# Altium PCB Project_PCBTA.PcbDoc
Units mm, origin at the board's own origin, x right, y up, seen from the top; angles counter-clockwise.
Board outline 152.4 x 101.6 mm, 2 copper layers (Top Layer, Bottom Layer); 36 components, 16 nets, 288 pads, 8 vias.
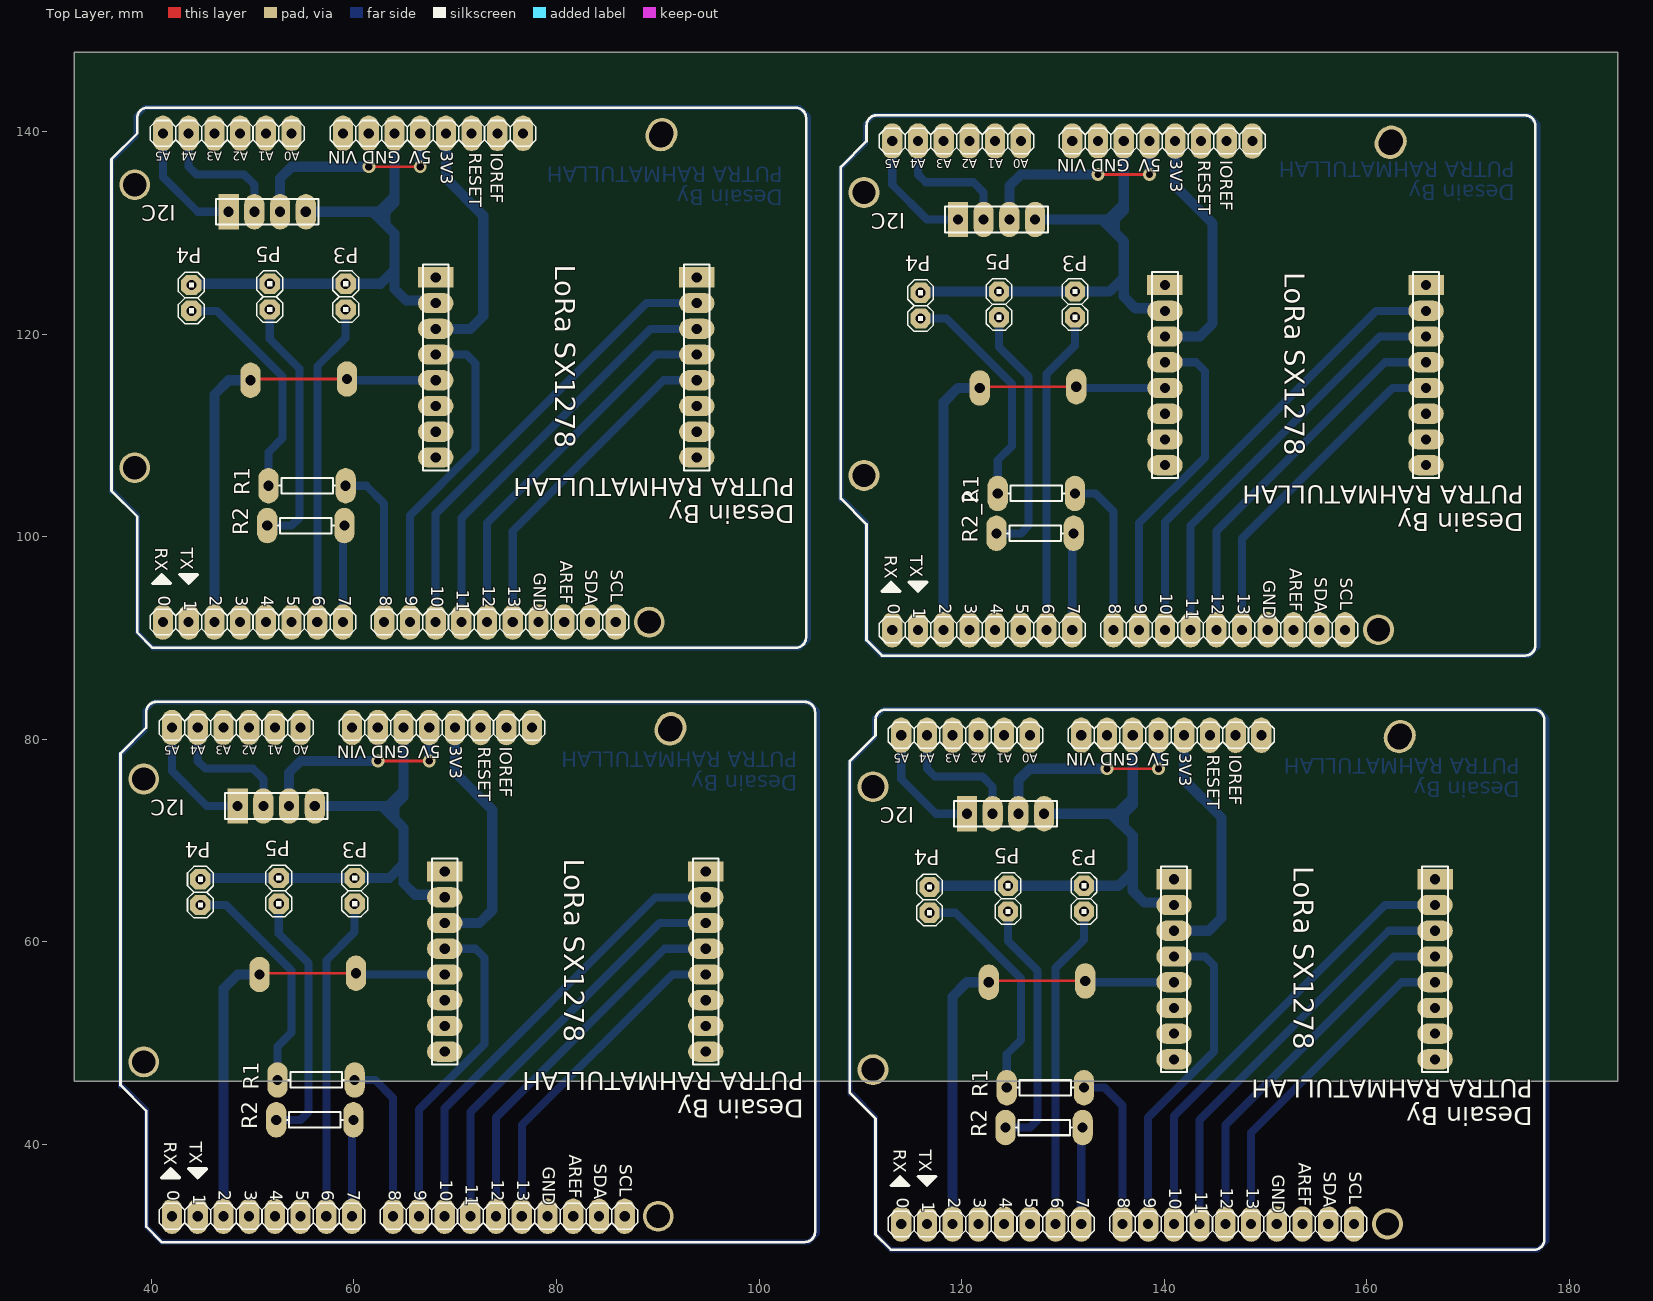
[diagram p0: Top Layer view]
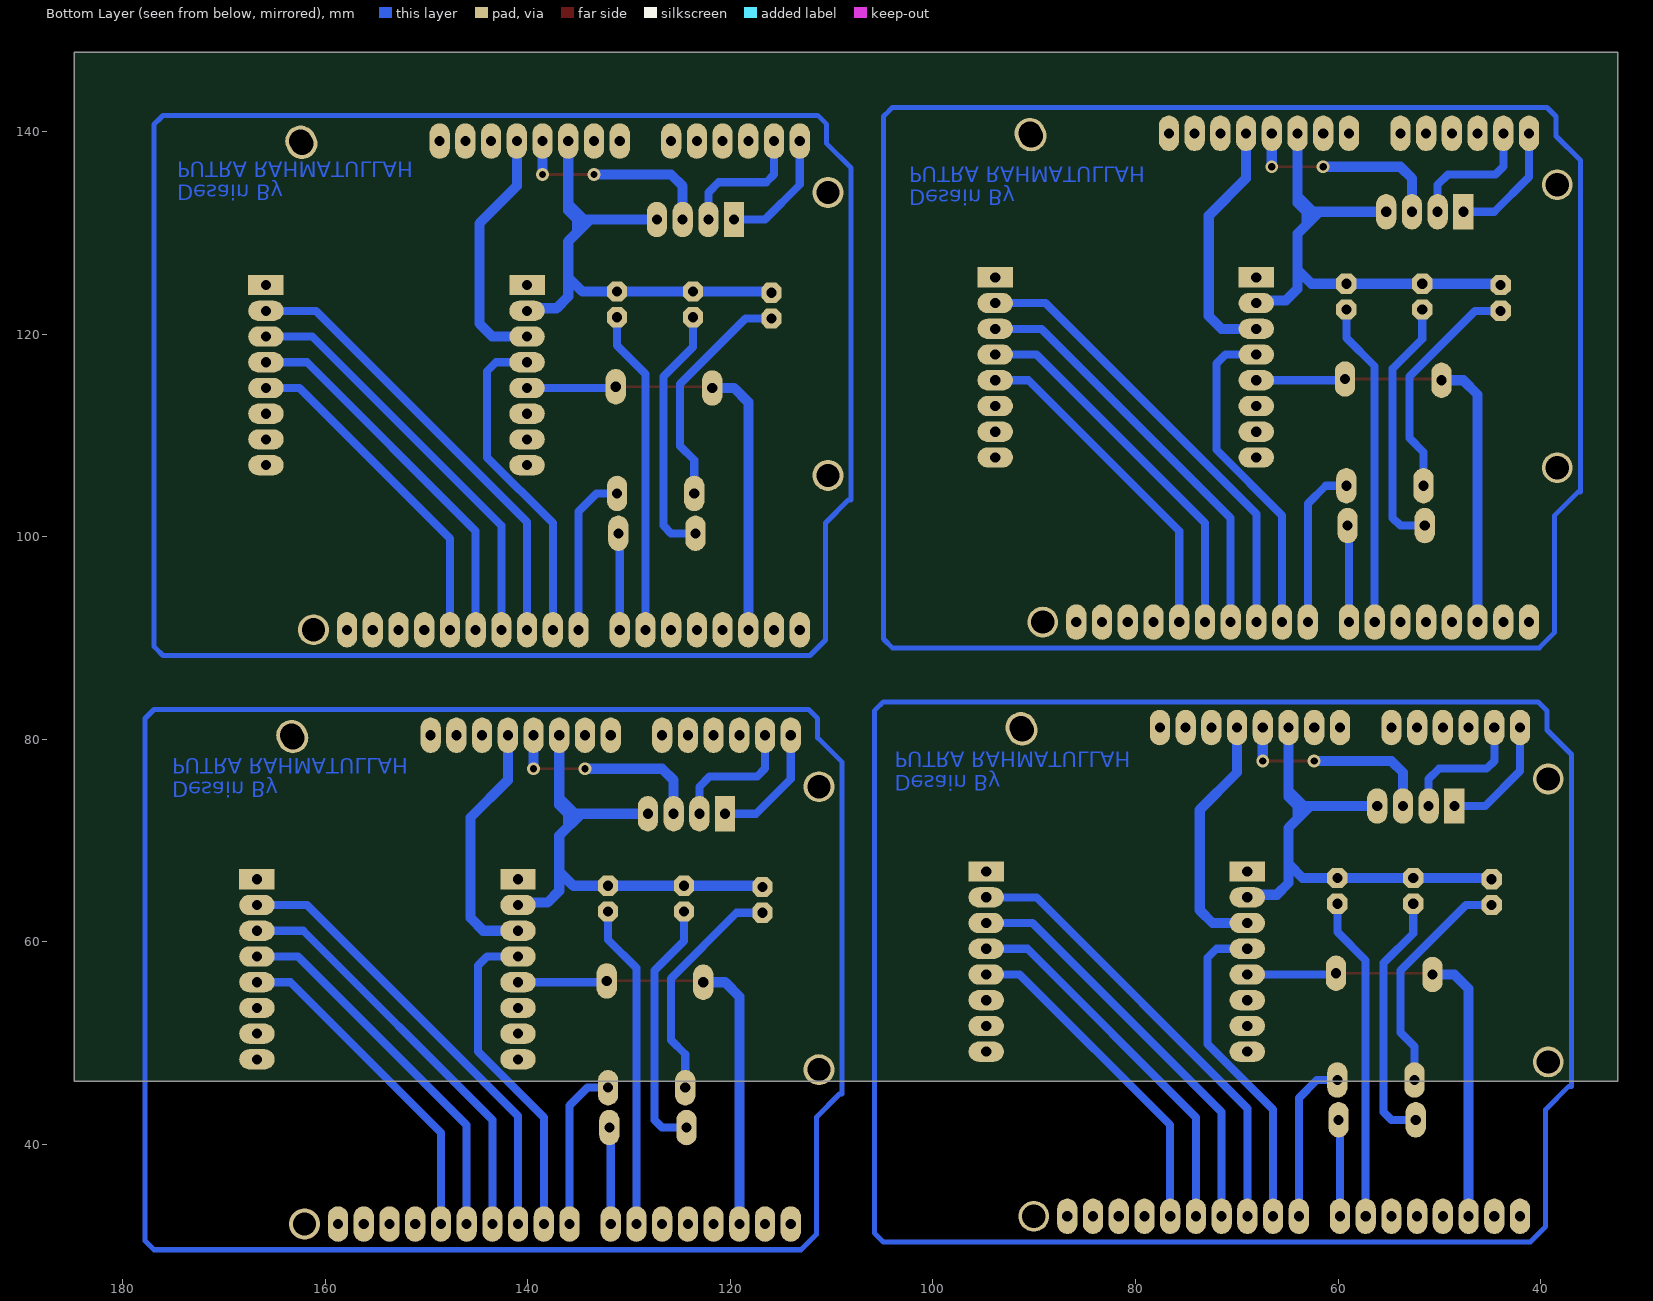
[diagram p1: Bottom Layer view, seen from below]

## Layer stack, top to bottom
Top Solder: solder mask 0.0102, Solder Resist, Dk 3.5
Top Layer: signal copper 0.0356
Dielectric 1: dielectric 0.32, FR-4, Dk 4.8
Bottom Layer: signal copper 0.0356
Bottom Solder: solder mask 0.0102, Solder Resist, Dk 3.5

## Board outline
184.785,147.828 32.385,147.828 32.385,46.228 184.785,46.228

## Design rules (kind name [scope] priority, off if disabled: settings)
Clearance [All] p1: gap=0.254
PolygonConnect [All] p1: connectstyle=Relief reliefconductorwidth=0.254 reliefentries=4 polygonreliefangle="90 Angle" airgapwidth=0.254
RoutingVias [All] p1: holewidth=0.711 width=1.27 viastyle="Through Hole" minholewidth=0.711 minwidth=1.27 maxholewidth=0.711 maxwidth=1.27
SolderMaskExpansion [All] p1: expansion=0.102
Width [All] p1: maxlimit=1 minlimit=0.254 preferedwidth=0.8 toplayer_maxwidth=0.254 toplayer_prefwidth=0.254 bottomlayer_minwidth=0.5 minimp=50.000000 maximp=50.000000 favimp=50.000000
30 further rules are at their usual default settings.

## Components (designator, comment, footprint, x,y, rotation, side; value= is the part's Value field where it differs from the comment)
"Arduino Uno" "ARDUINO UNO" "ARDUINO UNO" 141.478,56.388 r180 top
"Arduino Uno" "ARDUINO UNO" "ARDUINO UNO" 69.469,57.15 r180 top
"Arduino Uno" "ARDUINO UNO" "ARDUINO UNO" 68.58,115.824 r180 top
"Arduino Uno" "ARDUINO UNO" "ARDUINO UNO" 140.589,115.062 r180 top
I2C "Header 4" HDR1X4 120.523,72.644 r0 top (schematic designator P6)
I2C "Header 4" HDR1X4 48.514,73.406 r0 top (schematic designator P6)
I2C "Header 4" HDR1X4 47.625,132.08 r0 top (schematic designator P6)
I2C "Header 4" HDR1X4 119.634,131.318 r0 top (schematic designator P6)
"LoRa SX1278" "Header 8" HDR1X8 166.751,66.167 r270 top (schematic designator P2)
"LoRa SX1278" "Header 8" HDR1X8 94.742,66.929 r270 top (schematic designator P2)
"LoRa SX1278" "Header 8" HDR1X8 93.853,125.603 r270 top (schematic designator P2)
"LoRa SX1278" "Header 8" HDR1X8 165.862,124.841 r270 top (schematic designator P2)
P1 "Header 8" HDR1X8 140.97,66.167 r270 top
P1 "Header 8" HDR1X8 68.961,66.929 r270 top
P1 "Header 8" HDR1X8 68.072,125.603 r270 top
P1 "Header 8" HDR1X8 140.081,124.841 r270 top
P3 "Header 2" My_1X02 132.08,62.992 r270 top
P3 "Header 2" My_1X02 60.071,63.754 r270 top
P3 "Header 2" My_1X02 59.182,122.428 r270 top
P3 "Header 2" My_1X02 131.191,121.666 r270 top
P4 "Header 2" My_1X02 116.84,62.865 r270 top
P4 "Header 2" My_1X02 44.831,63.627 r270 top
P4 "Header 2" My_1X02 43.942,122.301 r270 top
P4 "Header 2" My_1X02 115.951,121.539 r270 top
P5 "Header 2" My_1X02 124.587,62.992 r270 top
P5 "Header 2" My_1X02 52.578,63.754 r270 top
P5 "Header 2" My_1X02 51.689,122.428 r270 top
P5 "Header 2" My_1X02 123.698,121.666 r270 top
R1 "Res 0.25W" "Res 0.25" 128.27,45.593 r180 top
R1 "Res 0.25W" "Res 0.25" 56.261,46.355 r180 top
R1 "Res 0.25W" "Res 0.25" 55.372,105.029 r180 top
R1 "Res 0.25W" "Res 0.25" 127.381,104.267 r180 top
R2 "Res 0.25W" "Res 0.25" 128.143,41.656 r180 top
R2 "Res 0.25W" "Res 0.25" 56.134,42.418 r180 top
R2 "Res 0.25W" "Res 0.25" 55.245,101.092 r180 top
R2_2 "Res 0.25W" "Res 0.25" 127.254,100.33 r180 top (schematic designator R2)

## Footprints (in the part's own frame and the unit in brackets; to place one, negate y for a bottom-side part, rotate by r counter-clockwise, add the part's x,y. Pads: shape width x height; smd on the part's side, far side on the other; paste and mask are expansions set on the pad)
"ARDUINO UNO" [mm]
  oval 2x3.5 hole 1: 0(27.44,24.26) 1(24.9,24.26) 2(22.36,24.26) 3(19.82,24.26) 3.3V(-0.5,-24) 4(17.28,24.26) 5(14.74,24.26) 5V(2.04,-24) 6(12.2,24.26) 7(9.66,24.26) 8(5.596,24.26) 9(3.056,24.26) 10(0.516,24.26) 11(-2.024,24.26) 12(-4.564,24.26) 13(-7.104,24.26) A0(14.74,-24) A1(17.28,-24) A2(19.82,-24) A3(22.36,-24) A4(24.9,-24) A5(27.44,-24) AREF(-12.184,24.26) GND1(7.12,-24) GND2(4.58,-24) GND3(-9.644,24.26) IOREF(-5.58,-24) NC(-8.12,-24) RST(-3.04,-24) SCL(-17.264,24.26) SDA(-14.724,24.26) Vin(9.66,-24)
  silkscreen extent -36.06,-26.54 32.52,26.8
HDR1X4 [mm] "Connector; Header; 4 Position"
  rect 2x3.5 hole 1: 1(0,0)
  oval 2x3.5 hole 1: 2(2.54,0) 3(5.08,0) 4(7.62,0)
  silkscreen extent -1.27,-1.27 8.89,1.27
HDR1X8 [mm] "Connector; Header; 8 Position"
  rect 2x3.5 hole 1: 1(0,0)
  oval 2x3.5 hole 1: 2(2.54,0) 3(5.08,0) 4(7.62,0) 5(10.16,0) 6(12.7,0) 7(15.24,0) 8(17.78,0)
  silkscreen extent -1.27,-1.27 19.05,1.27
My_1X02 [mm]
  oct 2x2 hole 1: 1(-2.54,0) 2(0,0)
  silkscreen extent -3.81,-1.27 1.27,1.27
"Res 0.25" [mm] "Axial Device, Thru-Hole; 2 Leads; 0.3 in Pin Spacing"
  oval 2x3.5 hole 1: 1(-3.81,0) 2(3.81,0)
  silkscreen extent -2.77,-0.76 2.77,0.76, body extent -4.11,-1.2 4.11,1.2, height 2.7

## Part data
I2C I2C I2C I2C: "Header, 4-Pin"
"LoRa SX1278" "LoRa SX1278" "LoRa SX1278" "LoRa SX1278" P1 P1 P1 P1: "Header, 8-Pin"
P3 P3 P3 P3 P4 P4 P4 P4 P5 P5 P5 P5: "Header, 2-Pin"

## Free pads (board coordinates)
  round 3.048 hole 2.286 paste+0: 0(38.354,106.807) 0(39.243,48.133) 0(110.363,106.045) 0(111.252,47.371) 1(38.354,134.747) 1(39.243,76.073) 1(110.363,133.985) 1(111.252,75.311) 2(89.154,91.567) 2(90.043,32.893) 2(161.163,90.805) 2(162.052,32.131) 3(90.297,139.573) 3(91.186,80.899) 3(162.306,138.811) 3(163.195,80.137) 4(38.354,106.807) 4(39.243,48.133) 4(110.363,106.045) 4(111.252,47.371) 5(38.354,134.747) 5(39.243,76.073) 5(110.363,133.985) 5(111.252,75.311) 6(90.424,139.827) 6(91.313,81.153) 6(162.433,139.065) 6(163.322,80.391) 7(89.154,91.567) 7(90.043,32.893) 7(161.163,90.805) 7(162.052,32.131)
  oval 2x3.5 hole 1: 15(49.784,115.443) 15(50.673,56.769) 15(59.309,115.57) 15(60.198,56.896) 15(121.793,114.681) 15(122.682,56.007) 15(131.318,114.808) 15(132.207,56.134)

## Via types
v1: diameter 1.27, hole 0.711, Top Layer to Bottom Layer, 8 vias

## Nets (pads, with @x,y where several pads share a name; then routed paths per layer and width w, separated by ;. In a path a pad name is that pad's centre, name@x,y a point inside that pad or via, vN(x,y) a via of type N, cw(c..) or ccw(c..) an arc to the next point about the centre after c; other vN are vias at no path point)
5V: 
GND: 
"NetArduino Uno_2": 
"NetArduino Uno_6": 
"NetArduino Uno_7": 
"NetArduino Uno_8": 
"NetArduino Uno_9": 
"NetArduino Uno_10": 
"NetArduino Uno_11": 
"NetArduino Uno_12": 
"NetArduino Uno_13": 
"NetArduino Uno_A4": 
"NetArduino Uno_A5": 
NetP4_2: 
NetP5_2: 
VCC: 
pads on no net: "Arduino Uno.0" "Arduino Uno.1" "Arduino Uno.2" "Arduino Uno.3" "Arduino Uno.3.3V" "Arduino Uno.4" "Arduino Uno.5" "Arduino Uno.5V" "Arduino Uno.6" "Arduino Uno.7" "Arduino Uno.8" "Arduino Uno.9" "Arduino Uno.10" "Arduino Uno.11" "Arduino Uno.12" "Arduino Uno.13" "Arduino Uno.A0" "Arduino Uno.A1" "Arduino Uno.A2" "Arduino Uno.A3" "Arduino Uno.A4" "Arduino Uno.A5" "Arduino Uno.AREF" "Arduino Uno.GND1" "Arduino Uno.GND2" "Arduino Uno.GND3" "Arduino Uno.IOREF" "Arduino Uno.NC" "Arduino Uno.RST" "Arduino Uno.SCL" "Arduino Uno.SDA" "Arduino Uno.Vin" "LoRa SX1278.1" "LoRa SX1278.2" "LoRa SX1278.3" "LoRa SX1278.4" "LoRa SX1278.5" "LoRa SX1278.6" "LoRa SX1278.7" "LoRa SX1278.8" I2C.1 I2C.2 I2C.3 I2C.4 P1.1 P1.2 P1.3 P1.4 P1.5 P1.6 P1.7 P1.8 P3.1 P3.2 P4.1 P4.2 P5.1 P5.2 R1.1 R1.2 R2.1 R2.2 R2_2.1 R2_2.2
copper on no net: | length 2840.2
  Top Layer w0.254: 49.784,115.443 49.911,115.57 59.309,115.57 ; 50.673,56.769 50.8,56.896 60.198,56.896 ; v1(61.468,136.525) v1(66.548,136.525) ; v1(62.357,77.851) v1(67.437,77.851) ; 121.793,114.681 121.92,114.808 131.318,114.808 ; 122.682,56.007 122.809,56.134 132.207,56.134 ; v1(133.477,135.763) v1(138.557,135.763) ; v1(134.366,77.089) v1(139.446,77.089)
  Bottom Layer w0.5: 97.536,89.027 103.251,89.027 104.013,89.027 104.775,89.789 104.902,89.916 104.902,141.097 104.902,141.478 104.267,142.113 104.013,142.367 39.37,142.367 38.481,141.478 38.481,139.7 38.481,139.573 36.068,137.16 36.068,104.394 36.322,104.394 38.608,102.108 38.608,90.551 40.132,89.027 103.632,89.027 ; 98.425,30.353 104.14,30.353 104.902,30.353 105.664,31.115 105.791,31.242 105.791,82.423 105.791,82.804 105.156,83.439 104.902,83.693 40.259,83.693 39.37,82.804 39.37,81.026 39.37,80.899 36.957,78.486 36.957,45.72 37.211,45.72 39.497,43.434 39.497,31.877 41.021,30.353 104.521,30.353 ; 169.545,88.265 175.26,88.265 176.022,88.265 176.784,89.027 176.911,89.154 176.911,140.335 176.911,140.716 176.276,141.351 176.022,141.605 111.379,141.605 110.49,140.716 110.49,138.938 110.49,138.811 108.077,136.398 108.077,103.632 108.331,103.632 110.617,101.346 110.617,89.789 112.141,88.265 175.641,88.265 ; 170.434,29.591 176.149,29.591 176.911,29.591 177.673,30.353 177.8,30.48 177.8,81.661 177.8,82.042 177.165,82.677 176.911,82.931 112.268,82.931 111.379,82.042 111.379,80.264 111.379,80.137 108.966,77.724 108.966,44.958 109.22,44.958 111.506,42.672 111.506,31.115 113.03,29.591 176.53,29.591
  Bottom Layer w0.8: 41.14,139.824 41.14,135.517 44.577,132.08 47.625,132.08 ; 42.029,81.15 42.029,76.843 45.466,73.406 48.514,73.406 ; 43.68,139.824 43.68,136.533 44.45,135.763 49.149,135.763 50.165,134.747 50.165,132.08 ; 43.942,122.301 46.482,122.301 52.959,115.824 52.959,111.379 52.959,109.728 51.562,108.331 51.562,105.029 ; 44.569,81.15 44.569,77.859 45.339,77.089 50.038,77.089 51.054,76.073 51.054,73.406 ; 44.831,63.627 47.371,63.627 53.848,57.15 53.848,52.705 53.848,51.054 52.451,49.657 52.451,46.355 ; 51.435,101.092 53.848,101.092 54.61,101.854 54.61,110.363 54.61,116.586 51.689,119.507 51.689,122.428 ; 52.324,42.418 54.737,42.418 55.499,43.18 55.499,51.689 55.499,57.912 52.578,60.833 52.578,63.754 ; 56.38,91.564 56.38,116.832 59.182,119.634 59.182,122.428 ; 57.269,32.89 57.269,58.158 60.071,60.96 60.071,63.754 ; 58.92,91.564 58.92,100.957 59.055,101.092 ; 59.182,105.029 61.214,105.029 62.984,103.259 62.984,91.564 ; 59.436,115.443 68.072,115.443 ; 59.809,32.89 59.809,42.283 59.944,42.418 ; 60.071,46.355 62.103,46.355 63.873,44.585 63.873,32.89 ; 60.325,56.769 68.961,56.769 ; 65.524,91.564 65.524,102.1 72.009,108.585 72.009,117.094 71.12,117.983 68.072,117.983 ; 66.413,32.89 66.413,43.426 72.898,49.911 72.898,58.42 72.009,59.309 68.961,59.309 ; 68.064,91.564 68.064,102.227 88.9,123.063 93.853,123.063 ; 68.953,32.89 68.953,43.553 89.789,64.389 94.742,64.389 ; 70.604,91.564 70.604,101.846 89.281,120.523 93.853,120.523 ; 71.493,32.89 71.493,43.172 90.17,61.849 94.742,61.849 ; 73.144,91.564 73.144,101.338 89.789,117.983 93.853,117.983 ; 74.033,32.89 74.033,42.664 90.678,59.309 94.742,59.309 ; 75.684,91.564 75.684,100.576 90.551,115.443 93.853,115.443 ; 76.573,32.89 76.573,41.902 91.44,56.769 94.742,56.769 ; 113.149,139.062 113.149,134.755 116.586,131.318 119.634,131.318 ; 114.038,80.388 114.038,76.081 117.475,72.644 120.523,72.644 ; 115.689,139.062 115.689,135.771 116.459,135.001 121.158,135.001 122.174,133.985 122.174,131.318 ; 115.951,121.539 118.491,121.539 124.968,115.062 124.968,110.617 124.968,108.966 123.571,107.569 123.571,104.267 ; 116.578,80.388 116.578,77.097 117.348,76.327 122.047,76.327 123.063,75.311 123.063,72.644 ; 116.84,62.865 119.38,62.865 125.857,56.388 125.857,51.943 125.857,50.292 124.46,48.895 124.46,45.593 ; 123.444,100.33 125.857,100.33 126.619,101.092 126.619,109.601 126.619,115.824 123.698,118.745 123.698,121.666 ; 124.333,41.656 126.746,41.656 127.508,42.418 127.508,50.927 127.508,57.15 124.587,60.071 124.587,62.992 ; 128.389,90.802 128.389,116.07 131.191,118.872 131.191,121.666 ; 129.278,32.128 129.278,57.396 132.08,60.198 132.08,62.992 ; 130.929,90.802 130.929,100.195 131.064,100.33 ; 131.191,104.267 133.223,104.267 134.993,102.497 134.993,90.802 ; 131.445,114.681 140.081,114.681 ; 131.818,32.128 131.818,41.521 131.953,41.656 ; 132.08,45.593 134.112,45.593 135.882,43.823 135.882,32.128 ; 132.334,56.007 140.97,56.007 ; 137.533,90.802 137.533,101.338 144.018,107.823 144.018,116.332 143.129,117.221 140.081,117.221 ; 138.422,32.128 138.422,42.664 144.907,49.149 144.907,57.658 144.018,58.547 140.97,58.547 ; 140.073,90.802 140.073,101.465 160.909,122.301 165.862,122.301 ; 140.962,32.128 140.962,42.791 161.798,63.627 166.751,63.627 ; 142.613,90.802 142.613,101.084 161.29,119.761 165.862,119.761 ; 143.502,32.128 143.502,42.41 162.179,61.087 166.751,61.087 ; 145.153,90.802 145.153,100.576 161.798,117.221 165.862,117.221 ; 146.042,32.128 146.042,41.902 162.687,58.547 166.751,58.547 ; 147.693,90.802 147.693,99.814 162.56,114.681 165.862,114.681 ; 148.582,32.128 148.582,41.14 163.449,56.007 166.751,56.007
  Bottom Layer w1: 43.942,124.841 44.069,124.968 51.689,124.968 59.182,124.968 62.611,124.968 63.881,126.238 64,126.238 ; 44.831,66.167 44.958,66.294 52.578,66.294 60.071,66.294 63.5,66.294 64.77,67.564 64.889,67.564 ; 46.22,91.564 46.22,114.038 47.625,115.443 49.784,115.443 ; 47.109,32.89 47.109,55.364 48.514,56.769 50.673,56.769 ; 52.705,132.08 52.705,135.382 53.848,136.525 v1(61.468,136.525) ; 53.594,73.406 53.594,76.708 54.737,77.851 v1(62.357,77.851) ; 55.245,132.08 61.841,132.08 ; 56.134,73.406 62.73,73.406 ; 62.738,131.191 63.119,130.81 63.119,132.08 64,132.961 64,133.604 ; 63.627,72.517 64.008,72.136 64.008,73.406 64.889,74.287 64.889,74.93 ; 64,139.824 64,133.604 ; 64.889,81.15 64.889,74.93 ; 66.54,139.824 66.54,136.533 v1(66.548,136.525) ; 67.429,81.15 67.429,77.859 v1(67.437,77.851) ; 68.072,120.523 71.501,120.523 72.771,121.793 72.771,131.699 69.08,135.39 69.08,139.824 ; 68.072,123.063 67.818,123.317 65.151,123.317 64,124.468 64,126.238 ; 68.961,61.849 72.39,61.849 73.66,63.119 73.66,73.025 69.969,76.716 69.969,81.15 ; 68.961,64.389 68.707,64.643 66.04,64.643 64.889,65.794 64.889,67.564 ; 115.951,124.079 116.078,124.206 123.698,124.206 131.191,124.206 134.62,124.206 135.89,125.476 136.009,125.476 ; 116.84,65.405 116.967,65.532 124.587,65.532 132.08,65.532 135.509,65.532 136.779,66.802 136.898,66.802 ; 118.229,90.802 118.229,113.276 119.634,114.681 121.793,114.681 ; 119.118,32.128 119.118,54.602 120.523,56.007 122.682,56.007 ; 124.714,131.318 124.714,134.62 125.857,135.763 v1(133.477,135.763) ; 125.603,72.644 125.603,75.946 126.746,77.089 v1(134.366,77.089) ; 127.254,131.318 133.85,131.318 ; 128.143,72.644 134.739,72.644 ; 134.747,130.429 135.128,130.048 135.128,131.318 136.009,132.199 136.009,132.842 ; 135.636,71.755 136.017,71.374 136.017,72.644 136.898,73.525 136.898,74.168 ; 136.009,139.062 136.009,132.842 ; 136.898,80.388 136.898,74.168 ; 138.549,139.062 138.549,135.771 v1(138.557,135.763) ; 139.438,80.388 139.438,77.097 v1(139.446,77.089) ; 140.081,119.761 143.51,119.761 144.78,121.031 144.78,130.937 141.089,134.628 141.089,139.062 ; 140.081,122.301 139.827,122.555 137.16,122.555 136.009,123.706 136.009,125.476 ; 140.97,61.087 144.399,61.087 145.669,62.357 145.669,72.263 141.978,75.954 141.978,80.388 ; 140.97,63.627 140.716,63.881 138.049,63.881 136.898,65.032 136.898,66.802 ; 61.841,132.08 62.476,132.08 64,133.604 ; 61.841,132.08 64,129.921 64,126.238 ; 62.73,73.406 64.889,71.247 64.889,67.564 ; 62.73,73.406 63.365,73.406 64.889,74.93 ; 133.85,131.318 136.009,129.159 136.009,125.476 ; 133.85,131.318 134.485,131.318 136.009,132.842 ; 134.739,72.644 135.374,72.644 136.898,74.168 ; 134.739,72.644 136.898,70.485 136.898,66.802

## Other copper
Bottom Layer:
  text "Desain By  / PUTRA RAHMATULLAH" at 174.625,137.033 h1.52 r180
  text "Desain By  / PUTRA RAHMATULLAH" at 102.362,136.525 h1.52 r180
  text "Desain By  / PUTRA RAHMATULLAH" at 103.759,78.74 h1.52 r180
  text "Desain By  / PUTRA RAHMATULLAH" at 175.133,78.105 h1.52 r180

## Silkscreen, mask and mechanical layers (free items; w line width, h text height)
Top Overlay:
  text "Desain By / PUTRA RAHMATULLAH" at 103.505,105.791 h1.8 r180
  text "Desain By / PUTRA RAHMATULLAH" at 175.514,105.029 h1.8 r180
  text "Desain By / PUTRA RAHMATULLAH" at 104.394,47.117 h1.8 r180
  text "Desain By / PUTRA RAHMATULLAH" at 176.403,46.355 h1.8 r180

## Text inside footprints (layer, text, board x,y; h text height)
"Arduino Uno": Top Overlay "5V" at 140.581,78.61 h1.21 r180; Top Overlay "A0" at 127.525,78.585 h0.86 r180; Top Overlay "AREF" at 153.292,38.185 h1.21 r270; Top Overlay "GND" at 150.65,37.002 h1.21 r270; Top Overlay "RESET" at 144.264,78.483 h1.21 r270; Top Overlay "3V3" at 141.47,78.61 h1.21 r270; Top Overlay "A1" at 124.985,78.585 h0.86 r180; Top Overlay "A2" at 122.445,78.585 h0.86 r180; Top Overlay "A3" at 119.905,78.585 h0.86 r180; Top Overlay "A4" at 117.365,78.585 h0.86 r180; Top Overlay "A5" at 114.825,78.585 h0.86 r180; Top Overlay "VIN" at 133.215,78.61 h1.21 r180; Top Overlay "GND" at 137.508,78.61 h1.21 r180; Top Overlay "IOREF" at 146.423,78.483 h1.21 r270; Top Overlay "TX" at 115.816,39.469 h1.21 r270; Top Overlay "RX" at 113.276,39.494 h1.21 r270; Top Overlay "13" at 148.135,35.719 h1.21 r270; Top Overlay "12" at 145.595,35.719 h1.21 r270; Top Overlay "11" at 143.055,35.316 h1.21 r270; Top Overlay "10" at 140.515,35.719 h1.21 r270; Top Overlay "9" at 137.975,34.712 h1.21 r270; Top Overlay "8" at 135.435,34.712 h1.21 r270; Top Overlay "7" at 131.371,34.712 h1.21 r270; Top Overlay "6" at 128.831,34.712 h1.21 r270; Top Overlay "5" at 126.291,34.712 h1.21 r270; Top Overlay "4" at 123.751,34.712 h1.21 r270; Top Overlay "3" at 121.211,34.712 h1.21 r270; Top Overlay "2" at 118.671,34.712 h1.21 r270; Top Overlay "1" at 116.131,34.309 h1.21 r270; Top Overlay "0" at 113.591,34.712 h1.21 r270; Top Overlay "SCL" at 158.278,37.288 h1.21 r270; Top Overlay "SDA" at 155.749,37.301 h1.21 r270
"Arduino Uno": Top Overlay "5V" at 68.572,79.372 h1.21 r180; Top Overlay "A0" at 55.516,79.347 h0.86 r180; Top Overlay "AREF" at 81.283,38.947 h1.21 r270; Top Overlay "GND" at 78.641,37.764 h1.21 r270; Top Overlay "RESET" at 72.255,79.245 h1.21 r270; Top Overlay "3V3" at 69.461,79.372 h1.21 r270; Top Overlay "A1" at 52.976,79.347 h0.86 r180; Top Overlay "A2" at 50.436,79.347 h0.86 r180; Top Overlay "A3" at 47.896,79.347 h0.86 r180; Top Overlay "A4" at 45.356,79.347 h0.86 r180; Top Overlay "A5" at 42.816,79.347 h0.86 r180; Top Overlay "VIN" at 61.206,79.372 h1.21 r180; Top Overlay "GND" at 65.499,79.372 h1.21 r180; Top Overlay "IOREF" at 74.414,79.245 h1.21 r270; Top Overlay "TX" at 43.807,40.231 h1.21 r270; Top Overlay "RX" at 41.267,40.256 h1.21 r270; Top Overlay "13" at 76.126,36.481 h1.21 r270; Top Overlay "12" at 73.586,36.481 h1.21 r270; Top Overlay "11" at 71.046,36.078 h1.21 r270; Top Overlay "10" at 68.506,36.481 h1.21 r270; Top Overlay "9" at 65.966,35.474 h1.21 r270; Top Overlay "8" at 63.426,35.474 h1.21 r270; Top Overlay "7" at 59.362,35.474 h1.21 r270; Top Overlay "6" at 56.822,35.474 h1.21 r270; Top Overlay "5" at 54.282,35.474 h1.21 r270; Top Overlay "4" at 51.742,35.474 h1.21 r270; Top Overlay "3" at 49.202,35.474 h1.21 r270; Top Overlay "2" at 46.662,35.474 h1.21 r270; Top Overlay "1" at 44.122,35.071 h1.21 r270; Top Overlay "0" at 41.582,35.474 h1.21 r270; Top Overlay "SCL" at 86.269,38.05 h1.21 r270; Top Overlay "SDA" at 83.74,38.063 h1.21 r270
"Arduino Uno": Top Overlay "5V" at 67.683,138.046 h1.21 r180; Top Overlay "A0" at 54.627,138.021 h0.86 r180; Top Overlay "AREF" at 80.394,97.621 h1.21 r270; Top Overlay "GND" at 77.752,96.438 h1.21 r270; Top Overlay "RESET" at 71.366,137.919 h1.21 r270; Top Overlay "3V3" at 68.572,138.046 h1.21 r270; Top Overlay "A1" at 52.087,138.021 h0.86 r180; Top Overlay "A2" at 49.547,138.021 h0.86 r180; Top Overlay "A3" at 47.007,138.021 h0.86 r180; Top Overlay "A4" at 44.467,138.021 h0.86 r180; Top Overlay "A5" at 41.927,138.021 h0.86 r180; Top Overlay "VIN" at 60.317,138.046 h1.21 r180; Top Overlay "GND" at 64.61,138.046 h1.21 r180; Top Overlay "IOREF" at 73.525,137.919 h1.21 r270; Top Overlay "TX" at 42.918,98.905 h1.21 r270; Top Overlay "RX" at 40.378,98.93 h1.21 r270; Top Overlay "13" at 75.237,95.155 h1.21 r270; Top Overlay "12" at 72.697,95.155 h1.21 r270; Top Overlay "11" at 70.157,94.752 h1.21 r270; Top Overlay "10" at 67.617,95.155 h1.21 r270; Top Overlay "9" at 65.077,94.148 h1.21 r270; Top Overlay "8" at 62.537,94.148 h1.21 r270; Top Overlay "7" at 58.473,94.148 h1.21 r270; Top Overlay "6" at 55.933,94.148 h1.21 r270; Top Overlay "5" at 53.393,94.148 h1.21 r270; Top Overlay "4" at 50.853,94.148 h1.21 r270; Top Overlay "3" at 48.313,94.148 h1.21 r270; Top Overlay "2" at 45.773,94.148 h1.21 r270; Top Overlay "1" at 43.233,93.745 h1.21 r270; Top Overlay "0" at 40.693,94.148 h1.21 r270; Top Overlay "SCL" at 85.38,96.724 h1.21 r270; Top Overlay "SDA" at 82.851,96.737 h1.21 r270
"Arduino Uno": Top Overlay "5V" at 139.692,137.284 h1.21 r180; Top Overlay "A0" at 126.636,137.259 h0.86 r180; Top Overlay "AREF" at 152.403,96.859 h1.21 r270; Top Overlay "GND" at 149.761,95.676 h1.21 r270; Top Overlay "RESET" at 143.375,137.157 h1.21 r270; Top Overlay "3V3" at 140.581,137.284 h1.21 r270; Top Overlay "A1" at 124.096,137.259 h0.86 r180; Top Overlay "A2" at 121.556,137.259 h0.86 r180; Top Overlay "A3" at 119.016,137.259 h0.86 r180; Top Overlay "A4" at 116.476,137.259 h0.86 r180; Top Overlay "A5" at 113.936,137.259 h0.86 r180; Top Overlay "VIN" at 132.326,137.284 h1.21 r180; Top Overlay "GND" at 136.619,137.284 h1.21 r180; Top Overlay "IOREF" at 145.534,137.157 h1.21 r270; Top Overlay "TX" at 114.927,98.143 h1.21 r270; Top Overlay "RX" at 112.387,98.168 h1.21 r270; Top Overlay "13" at 147.246,94.393 h1.21 r270; Top Overlay "12" at 144.706,94.393 h1.21 r270; Top Overlay "11" at 142.166,93.99 h1.21 r270; Top Overlay "10" at 139.626,94.393 h1.21 r270; Top Overlay "9" at 137.086,93.386 h1.21 r270; Top Overlay "8" at 134.546,93.386 h1.21 r270; Top Overlay "7" at 130.482,93.386 h1.21 r270; Top Overlay "6" at 127.942,93.386 h1.21 r270; Top Overlay "5" at 125.402,93.386 h1.21 r270; Top Overlay "4" at 122.862,93.386 h1.21 r270; Top Overlay "3" at 120.322,93.386 h1.21 r270; Top Overlay "2" at 117.782,93.386 h1.21 r270; Top Overlay "1" at 115.242,92.983 h1.21 r270; Top Overlay "0" at 112.702,93.386 h1.21 r270; Top Overlay "SCL" at 157.389,95.962 h1.21 r270; Top Overlay "SDA" at 154.86,95.975 h1.21 r270